# EAGLE board A1000RTC (EAGLE 9.6.2)
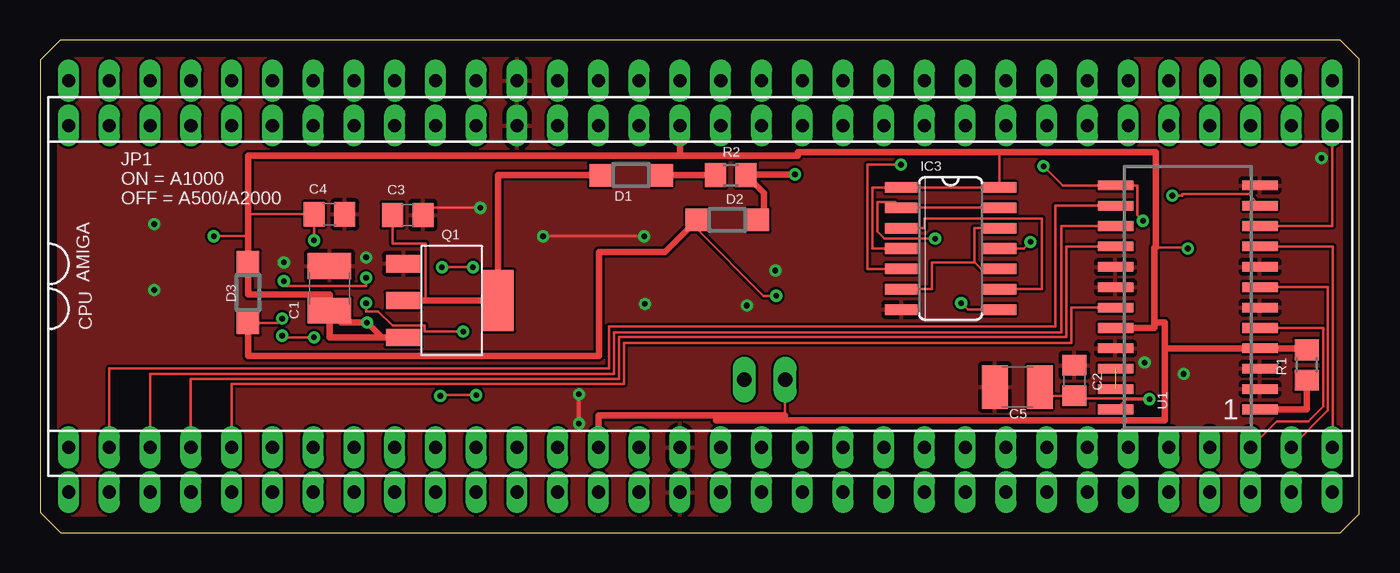
[diagram p0: board, top side]
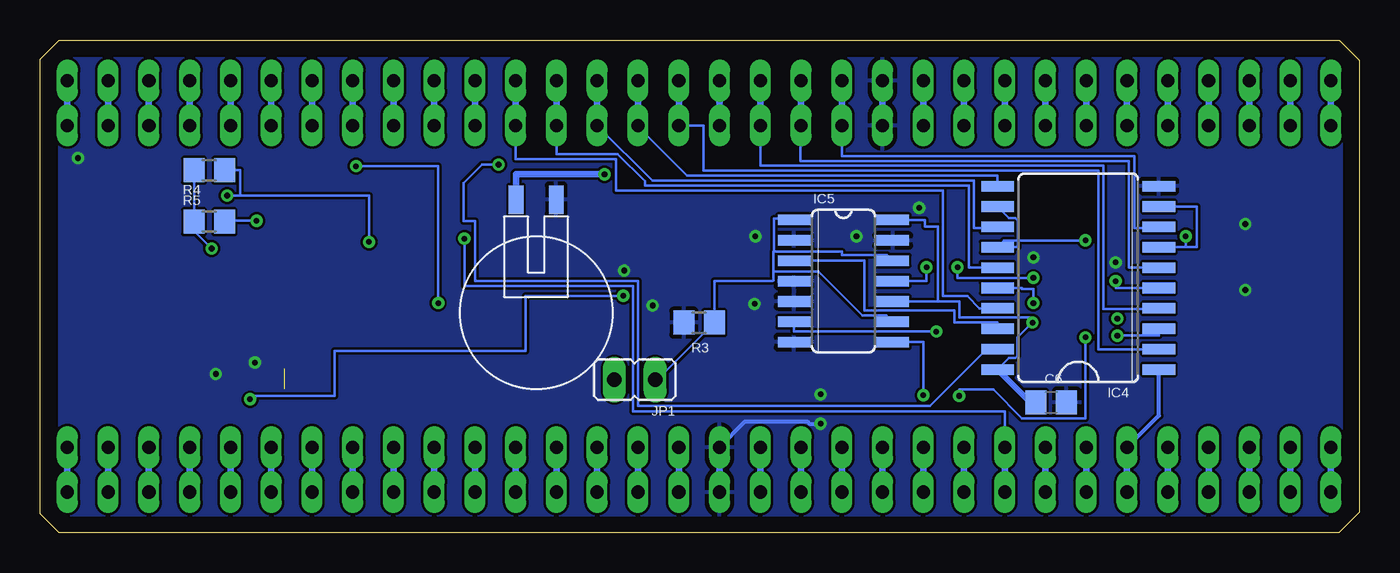
[diagram p1: board, bottom side, seen from below]

Size 82.22 x 30.72 mm. Coordinates in mm from the lower left corner, seen from the top.
Outline: 0,29.46 0,1.27 1.27,0 81.03,0 82.22,1.19 82.22,29.54 81.04,30.72 1.26,30.72 0,29.46
Copper layers (1*16): Top 0.035mm / dielectric 1.5mm / Bottom 0.035mm
Design rules "default": minimum track width 6mil, minimum drill 0.35mm, track to track 6mil, track to pad 6mil, pad to pad 6mil, via to via 6mil, smd to smd 6mil, copper to edge 40mil, drill to drill 6mil, minimum pad ring 10mil, minimum via ring 8mil, stop-mask expansion 4mil, vias tented up to drill 0mil, thermal gap 10mil

## Footprints (pad centres in the part's own frame; a part is rotated, then mirrored left to right if it is on the bottom)
DIL64 = drill 0.813 long: 1 -39.37,-11.43; 2 -36.83,-11.43; 3 -34.29,-11.43; 4 -31.75,-11.43; 5 -29.21,-11.43; 6 -26.67,-11.43; 7 -24.13,-11.43; 8 -21.59,-11.43; 9 -19.05,-11.43; 10 -16.51,-11.43; 11 -13.97,-11.43; 12 -11.43,-11.43; 13 -8.89,-11.43; 14 -6.35,-11.43; 15 -3.81,-11.43; 16 -1.27,-11.43; 17 1.27,-11.43; 18 3.81,-11.43; 19 6.35,-11.43; 20 8.89,-11.43; 21 11.43,-11.43; 22 13.97,-11.43; 23 16.51,-11.43; 24 19.05,-11.43; 25 21.59,-11.43; 26 24.13,-11.43; 27 26.67,-11.43; 28 29.21,-11.43; 29 31.75,-11.43; 30 34.29,-11.43; 31 36.83,-11.43; 32 39.37,-11.43; 33 39.37,11.43; 34 36.83,11.43; 35 34.29,11.43; 36 31.75,11.43; 37 29.21,11.43; 38 26.67,11.43; 39 24.13,11.43; 40 21.59,11.43; 41 19.05,11.43; 42 16.51,11.43; 43 13.97,11.43; 44 11.43,11.43; 45 8.89,11.43; 46 6.35,11.43; 47 3.81,11.43; 48 1.27,11.43; 49 -1.27,11.43; 50 -3.81,11.43; 51 -6.35,11.43; 52 -8.89,11.43; 53 -11.43,11.43; 54 -13.97,11.43; 55 -16.51,11.43; 56 -19.05,11.43; 57 -21.59,11.43; 58 -24.13,11.43; 59 -26.67,11.43; 60 -29.21,11.43; 61 -31.75,11.43; 62 -34.29,11.43; 63 -36.83,11.43; 64 -39.37,11.43
BATTCON_9.5MM = smd 1.778 x 0.914: + 7.06,1.25; - 7.06,-1.25
C1210 = smd 1.6 x 2.7: 1 -1.4,0; 2 1.4,0
C0805 = smd 1.3 x 1.5: 1 -0.95,0; 2 0.95,0
SOD123 = smd 1.4 x 1.4: A 1.9,0; C -1.9,0
SO14 = smd 0.66 x 2.032: 1 -3.81,-3.073; 2 -2.54,-3.073; 3 -1.27,-3.073; 4 0,-3.073; 5 1.27,-3.073; 6 2.54,-3.073; 7 3.81,-3.073; 8 3.81,3.073; 9 2.54,3.073; 10 1.27,3.073; 11 0,3.073; 12 -1.27,3.073; 13 -2.54,3.073; 14 -3.81,3.073
SO20W = smd 0.66 x 2.032: 1 -5.715,-5.029; 2 -4.445,-5.029; 3 -3.175,-5.029; 4 -1.905,-5.029; 5 -0.635,-5.029; 6 0.635,-5.029; 7 1.905,-5.029; 8 3.175,-5.029; 9 4.445,-5.029; 10 5.715,-5.029; 11 5.715,5.029; 12 4.445,5.029; 13 3.175,5.029; 14 1.905,5.029; 15 0.635,5.029; 16 -0.635,5.029; 17 -1.905,5.029; 18 -3.175,5.029; 19 -4.445,5.029; 20 -5.715,5.029
JP1 = drill 0.914 long: 1 0,-1.27; 2 0,1.27
SOT223-4 = smd 1.067 x 2.184: 1 -2.3,-3; 2 0,-3; 3 2.3,-3 | smd 3.81 x 1.93: 4 0,2.9
R0805 = smd 1.3 x 1.5: 1 -0.95,0; 2 0.95,0
SOP24 = smd 0.6 x 2.2: 1 -6.985,-4.5; 2 -5.715,-4.5; 3 -4.445,-4.5; 4 -3.175,-4.5; 5 -1.905,-4.5; 6 -0.635,-4.5; 7 0.635,-4.5; 8 1.905,-4.5; 9 3.175,-4.5; 10 4.445,-4.5; 11 5.715,-4.5; 12 6.985,-4.5; 13 6.985,4.5; 14 5.715,4.5; 15 4.445,4.5; 16 3.175,4.5; 17 1.905,4.5; 18 0.635,4.5; 19 -0.635,4.5; 20 -1.905,4.5; 21 -3.175,4.5; 22 -4.445,4.5; 23 -5.715,4.5; 24 -6.985,4.5

## Placement (x,y rotation side)
AMIGA  [DIL64]  41.15,16.76 0 top
BATT  MS920SE  [BATTCON_9.5MM]  51.31,13.72 90 bottom
C1  47uF  [C1210]  18.03,15.24 90 top
C2  100n  [C0805]  64.47,9.5 270 top
C3  100n  [C0805]  22.91,19.81 0 top
C4  100n  [C0805]  18.03,19.86 0 top
C5  22uF  [C1210]  60.91,9.09 180 top
C6  100n  [C0805]  19.2,8.13 0 bottom
CPU  [DIL64]  41.15,13.97 0 top
D1  BAT54W  [SOD123]  36.83,22.3 180 top
D2  BAT54W  [SOD123]  42.82,19.51 0 top
D3  BAT54W  [SOD123]  12.95,14.99 90 top
IC3  74AC00D  [SO14]  56.74,17.73 270 top
IC4  74HCT688DW  [SO20W]  17.53,15.9 90 bottom
IC5  74HCT86D  [SO14]  32.16,15.7 270 bottom
JP1  [JP1]  45.16,9.55 90 bottom
Q1  TLV1117  [SOT223-4]  25.65,14.48 270 top
R1  10k  [R0805]  78.94,10.46 90 top
R2  620  [R0805]  43.04,22.3 0 top
R3  10k  [R0805]  41.15,13.11 180 bottom
R4  10k  [R0805]  71.68,22.61 0 bottom
R5  10k  [R0805]  71.68,19.41 0 bottom
U1  MSM62X42BGSSOP24  [SOP24]  71.53,14.68 90 top

## Library data of the parts
AMIGA CPU = micro-mc68000; OC_FARNELL: unknown; OC_NEWARK: unknown
BATT = Amiga Matze
C1-C6 = rcl; SPICEPREFIX: C
D1-D3 = diode
IC3 = 74xx-eu
IC4 = 74xx-eu; SPICEPREFIX: X
IC5 = 74xx-eu; SPICEPREFIX: J
JP1 = jumper
Q1 = ti-parts
R1-R5 = rcl; SPICEPREFIX: R
U1 = OKI MSM6242B

## Nets
!AS: AMIGA.6 CPU.6 IC4.1
!RD: IC3.11 R4.2 U1.11
!RTC_ENABLE: IC3.5 IC4.19
!WR: IC3.8 R5.2 U1.13
A1: AMIGA.29 CPU.29
A2: AMIGA.30 CPU.30 U1.5
A3: AMIGA.31 CPU.31 U1.7
A4: AMIGA.32 CPU.32 U1.9
A5: AMIGA.33 CPU.33 U1.10
A6: AMIGA.34 CPU.34
A7: AMIGA.35 CPU.35
A8: AMIGA.36 CPU.36
A9: AMIGA.37 CPU.37
A10: AMIGA.38 CPU.38
A11: AMIGA.39 CPU.39
A12: AMIGA.40 CPU.40
A13: AMIGA.41 CPU.41
A14: AMIGA.42 CPU.42
A15: AMIGA.43 CPU.43
A16: AMIGA.44 CPU.44 IC4.17
A17: AMIGA.45 CPU.45 IC4.15
A18: AMIGA.46 CPU.46 IC4.13
A19: AMIGA.47 CPU.47 IC4.11
A20: AMIGA.48 CPU.48 IC4.2
A21: AMIGA.50 CPU.50 IC4.4
A22: AMIGA.51 CPU.51 IC4.6
A23: AMIGA.52 CPU.52 IC4.8
BERR: AMIGA.22 CPU.22
BG: AMIGA.11 CPU.11
BGACK: AMIGA.12 CPU.12
BR: AMIGA.13 CPU.13
CLK: AMIGA.15 CPU.15
D0: AMIGA.5 CPU.5 U1.19
D1: AMIGA.4 CPU.4 U1.16
D2: AMIGA.3 CPU.3 U1.15
D3: AMIGA.2 CPU.2 U1.14
D4: AMIGA.1 CPU.1
D5: AMIGA.64 CPU.64
D6: AMIGA.63 CPU.63
D7: AMIGA.62 CPU.62
D8: AMIGA.61 CPU.61
D9: AMIGA.60 CPU.60
D10: AMIGA.59 CPU.59
D11: AMIGA.58 CPU.58
D12: AMIGA.57 CPU.57
D13: AMIGA.56 CPU.56
D14: AMIGA.55 CPU.55
D15: AMIGA.54 CPU.54
DIO2: C2.2 C5.1 D2.C D3.C U1.24
DTACK: AMIGA.10 CPU.10
E: AMIGA.20 CPU.20
FC0: AMIGA.28 CPU.28
FC1: AMIGA.27 CPU.27
FC2: AMIGA.26 CPU.26
GND: AMIGA.16 AMIGA.53 BATT.- C1.2 C2.1 C3.2 C4.2 C5.2 C6.2 CPU.16 CPU.53 IC3.7 IC4.10 IC5.2 IC5.4 IC5.5 IC5.7 IC5.13 Q1.1 R3.2 U1.2 U1.3 U1.6 U1.8 U1.12 U1.17 U1.18 U1.21
HALT: AMIGA.17 CPU.17
IPL0: AMIGA.25 CPU.25
IPL1: AMIGA.24 CPU.24
IPL2: AMIGA.23 CPU.23
JP1: IC5.1 IC5.9 IC5.12 JP1.1 R3.1
LDS: AMIGA.8 CPU.8
N$1: R1.1 U1.1
N$2: IC3.6 IC3.10 IC3.12
N$3: IC3.3 IC3.9
N$5: BATT.+ D2.A R2.2
N$6: D1.C R2.1
Q0: IC4.3 IC5.8
Q1: IC4.5 IC5.11
Q6: IC4.16 IC5.6
Q7: IC4.18 IC5.3
R/!W: AMIGA.9 CPU.9 IC3.2 IC3.13
RESET: AMIGA.18 CPU.18
UDS: AMIGA.7 CPU.7
VCC: AMIGA.14 AMIGA.49 C1.1 C4.1 C6.1 CPU.14 CPU.49 D3.A IC3.1 IC3.4 IC3.14 IC4.7 IC4.9 IC4.12 IC4.14 IC4.20 IC5.10 IC5.14 JP1.2 Q1.3 R1.2 R4.1 R5.1 U1.4 U1.20
VCC3.3: C3.1 D1.A Q1.2 Q1.4
VDD: U1.22 U1.23
VMA: AMIGA.19 CPU.19
VPA: AMIGA.21 CPU.21

## Tracks (layer width: path | path; a pad name or v marks a point on that pad's centre or on a via)
!AS
  Bottom 0.254: AMIGA.6 12.5,7.31 IC4.1
  Bottom 0.406: AMIGA.6 CPU.6
!RD  (via drill 0.35)
  Top 0.152: v70.56,21.03 71.17,21.03 71.17,21.11 75.32,21.11 U1.11 | IC3.11 61.32,17.73 v61.72,18.14
  Bottom 0.152: v61.72,18.14 61.72,21.03 69.75,21.03 | 69.75,21.03 v70.56,21.03 | R4.2 69.75,22.61 69.75,21.03
!RTC_ENABLE  (via drill 0.35)
  Top 0.152: v53.64,22.96 51.56,22.96 51.56,16.46 IC3.5
  Bottom 0.152: IC4.19 23.22,11.45 26.77,7.9 44.96,7.9 44.96,15.7 55.12,15.7 55.12,19.45 55.83,19.45 55.83,21.79 54.66,22.96 v53.64,22.96
!WR  (via drill 0.35)
  Top 0.152: v62.54,22.86 63.73,21.67 U1.13 68.38,21.67 68.38,19.81 v68.73,19.46 | v57.4,14.33 57.81,13.92 IC3.8
  Bottom 0.152: v62.54,22.86 57.4,22.86 v57.4,14.33 | R5.2 70.68,19.46 v68.73,19.46
A1
  Bottom 0.406: AMIGA.29 CPU.29
A2
  Top 0.152: AMIGA.30 77.06,6.96 79.05,6.96 79.96,7.87 79.96,12.78 U1.5
  Bottom 0.406: AMIGA.30 CPU.30
A3
  Top 0.152: AMIGA.31 80.26,7.62 80.26,15.32 U1.7
  Bottom 0.406: AMIGA.31 CPU.31
A4
  Top 0.152: AMIGA.32 80.57,5.38 80.57,17.86 U1.9
  Bottom 0.406: AMIGA.32 CPU.32
A5
  Top 0.152: CPU.33 80.52,19.13 U1.10
  Bottom 0.406: AMIGA.33 CPU.33
A6
  Bottom 0.406: AMIGA.34 CPU.34
A7
  Bottom 0.406: AMIGA.35 CPU.35
A8
  Bottom 0.406: AMIGA.36 CPU.36
A9
  Bottom 0.406: AMIGA.37 CPU.37
A10
  Bottom 0.406: AMIGA.38 CPU.38
A11
  Bottom 0.406: AMIGA.39 CPU.39
A12
  Bottom 0.406: AMIGA.40 CPU.40
A13
  Bottom 0.406: AMIGA.41 CPU.41
A14
  Bottom 0.406: AMIGA.42 CPU.42
A15
  Bottom 0.406: AMIGA.43 CPU.43
A16
  Bottom 0.152: CPU.44 52.58,23.32 46.35,23.32 46.34,23.3 46.34,21.34 25.96,21.34 25.96,14.76 24.44,14.76 23.67,13.99 IC4.17
  Bottom 0.406: AMIGA.44 CPU.44
A17
  Bottom 0.152: CPU.45 50.04,23.62 46.23,23.62 44.53,21.92 44.53,21.67 24.33,21.67 24.33,16.53 IC4.15
  Bottom 0.406: AMIGA.45 CPU.45
A18
  Bottom 0.152: CPU.46 44.07,21.97 24.03,21.97 24.03,19 22.55,19 IC4.13
  Bottom 0.406: AMIGA.46 CPU.46
A19
  Bottom 0.152: CPU.47 44.96,25.32 41.91,22.28 22.55,22.28 IC4.11
  Bottom 0.406: AMIGA.47 CPU.47
A20
  Bottom 0.152: CPU.48 40.87,25.4 40.87,22.58 16.26,22.58 16.26,11.43 12.5,11.43 IC4.2
  Bottom 0.406: AMIGA.48 CPU.48
A21
  Bottom 0.152: CPU.50 37.31,25.4 37.31,22.88 15.95,22.88 15.95,13.97 12.5,13.97 IC4.4
  Bottom 0.406: AMIGA.50 CPU.50
A22
  Bottom 0.152: CPU.51 34.82,25.38 34.82,23.19 14.38,23.19 14.38,16.53 IC4.6
  Bottom 0.406: AMIGA.51 CPU.51
A23
  Bottom 0.152: CPU.52 32.26,23.49 14.02,23.49 14.02,19 12.5,19 IC4.8
  Bottom 0.406: AMIGA.52 CPU.52
BERR
  Bottom 0.406: AMIGA.22 CPU.22
BG
  Bottom 0.406: AMIGA.11 CPU.11
BGACK
  Bottom 0.406: AMIGA.12 CPU.12
BR
  Bottom 0.406: AMIGA.13 CPU.13
CLK
  Bottom 0.406: AMIGA.15 CPU.15
D0
  Top 0.152: AMIGA.5 11.94,9.3 36.38,9.3 36.38,11.85 64.28,11.85 64.28,14.05 U1.19
  Bottom 0.406: AMIGA.5 CPU.5
D1
  Top 0.152: U1.16 63.96,17.86 63.96,12.2 36.08,12.2 36.08,9.6 9.4,9.6 AMIGA.4
  Bottom 0.406: AMIGA.4 CPU.4
D2
  Top 0.152: U1.15 63.65,19.13 63.65,12.51 35.77,12.51 35.77,9.91 6.86,9.91 AMIGA.3
  Bottom 0.406: AMIGA.3 CPU.3
D3
  Top 0.152: U1.14 63.27,20.4 63.27,12.86 35.47,12.86 35.47,10.25 4.32,10.25 AMIGA.2
  Bottom 0.406: AMIGA.2 CPU.2
D4
  Bottom 0.406: AMIGA.1 CPU.1
D5
  Bottom 0.406: AMIGA.64 CPU.64
D6
  Bottom 0.406: AMIGA.63 CPU.63
D7
  Bottom 0.406: AMIGA.62 CPU.62
D8
  Bottom 0.406: AMIGA.61 CPU.61
D9
  Bottom 0.406: AMIGA.60 CPU.60
D10
  Bottom 0.406: AMIGA.59 CPU.59
D11
  Bottom 0.406: AMIGA.58 CPU.58
D12
  Bottom 0.406: AMIGA.57 CPU.57
D13
  Bottom 0.406: AMIGA.56 CPU.56
D14
  Bottom 0.406: AMIGA.55 CPU.55
D15
  Bottom 0.406: AMIGA.54 CPU.54
DIO2  (via drill 0.35)
  Top 0.152: D3.C 14.81,13.09 v15.09,13.36 | C5.1 62.7,8.55 C2.2 64.62,8.4 69.07,8.4 v69.14,8.33 67.66,8.33 U1.24 | v45.87,14.78 45.09,14.78 40.92,18.95 D2.C
  Top 0.406: D2.C 38.93,17.52 34.85,17.52 34.85,11.03 12.95,11.03 D3.C
  Bottom 0.152: v69.14,8.33 68.94,8.53 63.86,8.53 63.86,11.33 51.97,11.33 51.97,14.78 v45.87,14.78
DTACK
  Bottom 0.406: CPU.10 AMIGA.10
E
  Bottom 0.406: AMIGA.20 CPU.20
FC0
  Bottom 0.406: AMIGA.28 CPU.28
FC1
  Bottom 0.406: AMIGA.27 CPU.27
FC2
  Bottom 0.406: AMIGA.26 CPU.26
GND  (via drill 0.35)
  Top 0.152: v27.43,20.27 24.32,20.27 C3.2 | v31.34,18.49 v37.64,18.49
  Top 0.254: v33.58,6.81 v33.58,8.64
  Bottom 0.254: v33.58,6.81 34.28,6.81 34.41,6.93 38.28,6.93 AMIGA.16
  Bottom 0.406: AMIGA.53 CPU.53 | AMIGA.16 CPU.16
  other vias: 68.83,10.62 71.27,9.91 79.86,23.37 45.82,16.36 15.19,16.87 7.11,15.14 7.11,19.25 20.32,17.17 37.69,14.27 44.04,14.17
  pour Top: 1.02,29.72 81.03,29.72 81.28,29.46 81.28,1.27 81.03,1.02 1.27,1.02 1.02,1.27
  pour Bottom: 1.02,29.72 81.03,29.72 81.03,1.02 1.27,1.02 1.02,1.27
HALT
  Bottom 0.406: AMIGA.17 CPU.17
IPL0
  Bottom 0.406: AMIGA.25 CPU.25
IPL1
  Bottom 0.406: AMIGA.24 CPU.24
IPL2
  Bottom 0.406: AMIGA.23 CPU.23
JP1
  Bottom 0.152: JP1.1 43.75,9.55 R3.1 40.2,15.44 40.2,15.7 36.58,15.7 36.52,15.75 36.52,16.31 | IC5.12 29.44,17.32 32.26,17.32 32.26,17.53 36.52,17.53 | 36.52,16.31 36.52,17.53 | IC5.9 29.49,13.56 30.96,13.56 33.7,16.31 36.52,16.31 | 36.52,17.53 36.47,17.58 36.47,19.61 35.33,19.61 IC5.1
LDS
  Bottom 0.406: CPU.8 AMIGA.8
N$1
  Top 0.406: R1.1 78.94,7.7 U1.1
N$2
  Top 0.152: IC3.6 55.57,15.19 55.57,16.87 58.22,16.87 | IC3.10 58.67,16.46 58.27,16.87 58.22,16.87 | IC3.12 58.22,19 58.22,16.87
N$3
  Top 0.152: IC3.3 55.12,19 55.12,19.61 62.43,19.61 62.43,15.19 IC3.9
N$5  (via drill 0.35)
  Top 0.406: v47.04,22.35 44.04,22.35 R2.2 45.11,21.18 45.11,19.89 D2.A
  Bottom 0.406: v47.04,22.35 47.06,22.38 52.56,22.38 BATT.+
N$6
  Top 0.406: R2.1 D1.C
Q0  (via drill 0.35)
  Top 0.152: v15.09,12.29 15.09,12.19 v17.07,12.19 | v24.94,8.53 24.94,8.59 v27.18,8.59
  Bottom 0.152: IC4.3 12.5,12.29 v15.09,12.29 | v17.07,12.19 17.07,7.15 21.03,7.15 22.82,8.94 24.94,8.94 v24.94,8.53 | v27.18,8.59 27.18,11.89 IC5.8
Q1  (via drill 0.35)
  Top 0.152: v26.98,16.56 v25.04,16.56 | v20.32,15.9 20.32,15.39 15.19,15.39 v15.19,15.7
  Bottom 0.152: IC5.11 26.98,15.7 v26.98,16.56 | v25.04,16.56 25.04,15.9 v20.32,15.9 | v15.19,15.7 15.19,15.27 IC4.5
Q6  (via drill 0.35)
  Top 0.152: v20.32,14.33 20.32,13.81 21.08,13.81 21.95,12.94 23.98,12.94 23.98,12.55 v26.36,12.55
  Bottom 0.152: IC4.16 21.03,15.27 21.03,15.19 20.32,15.19 v20.32,14.33 | v26.36,12.55 35.23,12.55 IC5.6
Q7
  Bottom 0.152: IC5.3 30.84,16.97 30.84,13.87 25.25,13.87 25.25,13.13 22.55,13.13 IC4.18
R/!W  (via drill 0.35)
  Top 0.152: IC3.13 IC3.2 53.31,20.62 52.17,20.62 52.17,18.8 52.63,18.34 v55.78,18.34
  Bottom 0.152: 22.1,5.08 22.1,7.57 45.26,7.57 45.26,15.39 55.78,15.39 v55.78,18.34
  Bottom 0.406: CPU.9 22.1,5.08 AMIGA.9
RESET
  Bottom 0.406: AMIGA.18 CPU.18
UDS
  Bottom 0.406: CPU.7 AMIGA.7
VCC  (via drill 0.35)
  Top 0.152: 59.79,23.72 59.79,21.56 IC3.14 IC3.1 51.87,21.54 51.87,17.73 IC3.4 | v71.53,17.73 71.48,17.78 69.54,17.78 69.44,17.78 | v17.07,18.24 17.07,19.85 C4.1 12.95,19.86 | v10.82,18.49 12.95,18.49 | JP1.2 46.43,7.31 | 42.11,7.31 42.11,7.01
  Top 0.406: C1.1 18.03,12.18 Q1.3 21.3,12.18 v20.37,13.11 18.77,13.11 C1.1 | C1.1 18.03,14.86 12.95,14.86 D3.A 12.95,18.49 12.95,19.86 12.95,23.52 39.88,23.52 | 39.88,23.52 47.24,23.52 47.24,23.72 59.79,23.72 69.54,23.72 69.54,17.78 | CPU.49 39.88,23.52 | R1.2 78.85,11.51 U1.4 70.1,11.51 | U1.20 69.44,12.78 69.44,13.13 | 69.44,13.13 70.1,13.13 70.1,11.51 | 70.1,11.51 70.1,7.01 42.11,7.01 | 46.43,7.31 42.11,7.31 34.8,7.31 AMIGA.14 | 69.44,13.13 69.44,17.78
  Bottom 0.152: IC4.20 21.84,10.9 21.45,10.9 21.31,11.03 21.31,12.17 v20.37,13.11 20.37,13.44 24.94,13.44 24.94,14.43 26.26,14.43 | R4.1 R5.1 72.63,18.83 v71.53,17.73 | IC4.9 10.13,20.34 10.13,17.8 10.82,17.8 | IC4.7 10.82,17.8 | IC4.12 21.84,19.63 21.45,19.63 21.28,19.48 21.28,17.8 IC4.14 22.15,18.21 17.44,18.21 17.41,18.24 v17.07,18.24 | 10.82,17.8 v10.82,18.49 | 26.26,14.43 IC5.10 | IC5.14 27.07,19.51 27.07,19.1 26.26,19.1 26.26,14.43
  Bottom 0.406: AMIGA.14 CPU.14 | AMIGA.49 CPU.49 | IC4.20 20.15,7.78 C6.1
VCC3.3
  Top 0.152: C3.1 21.96,18.03 24.03,18.03 24.03,14.48
  Top 0.406: D1.A 28.55,22.3 Q1.4 24.03,14.48 Q1.2
VDD  (1 unrouted)
VMA
  Bottom 0.406: AMIGA.19 CPU.19
VPA
  Bottom 0.406: AMIGA.21 CPU.21

## Text on the board
tNames: JP1 / ON = A1000 / OFF = A500/A2000
tValues: A1K / SimpleClock | final
bValues: (c)2021 Marcel Jähne / Free for non-commercial use / Dedicated to my lovely wife Jasmin / and my son Eskil | -